# Altium PCB PCB_SHERPA_MK_II.PcbDoc
Units mm, origin at the board's own origin, x right, y up, seen from the top; angles counter-clockwise.
Board outline 70.1 x 51.31 mm, 4 copper layers (Top Layer, Mid-Layer 1, Mid-Layer 2, Bottom Layer), stack 1.584 mm thick; 105 components, 108 nets, 447 pads, 149 vias.
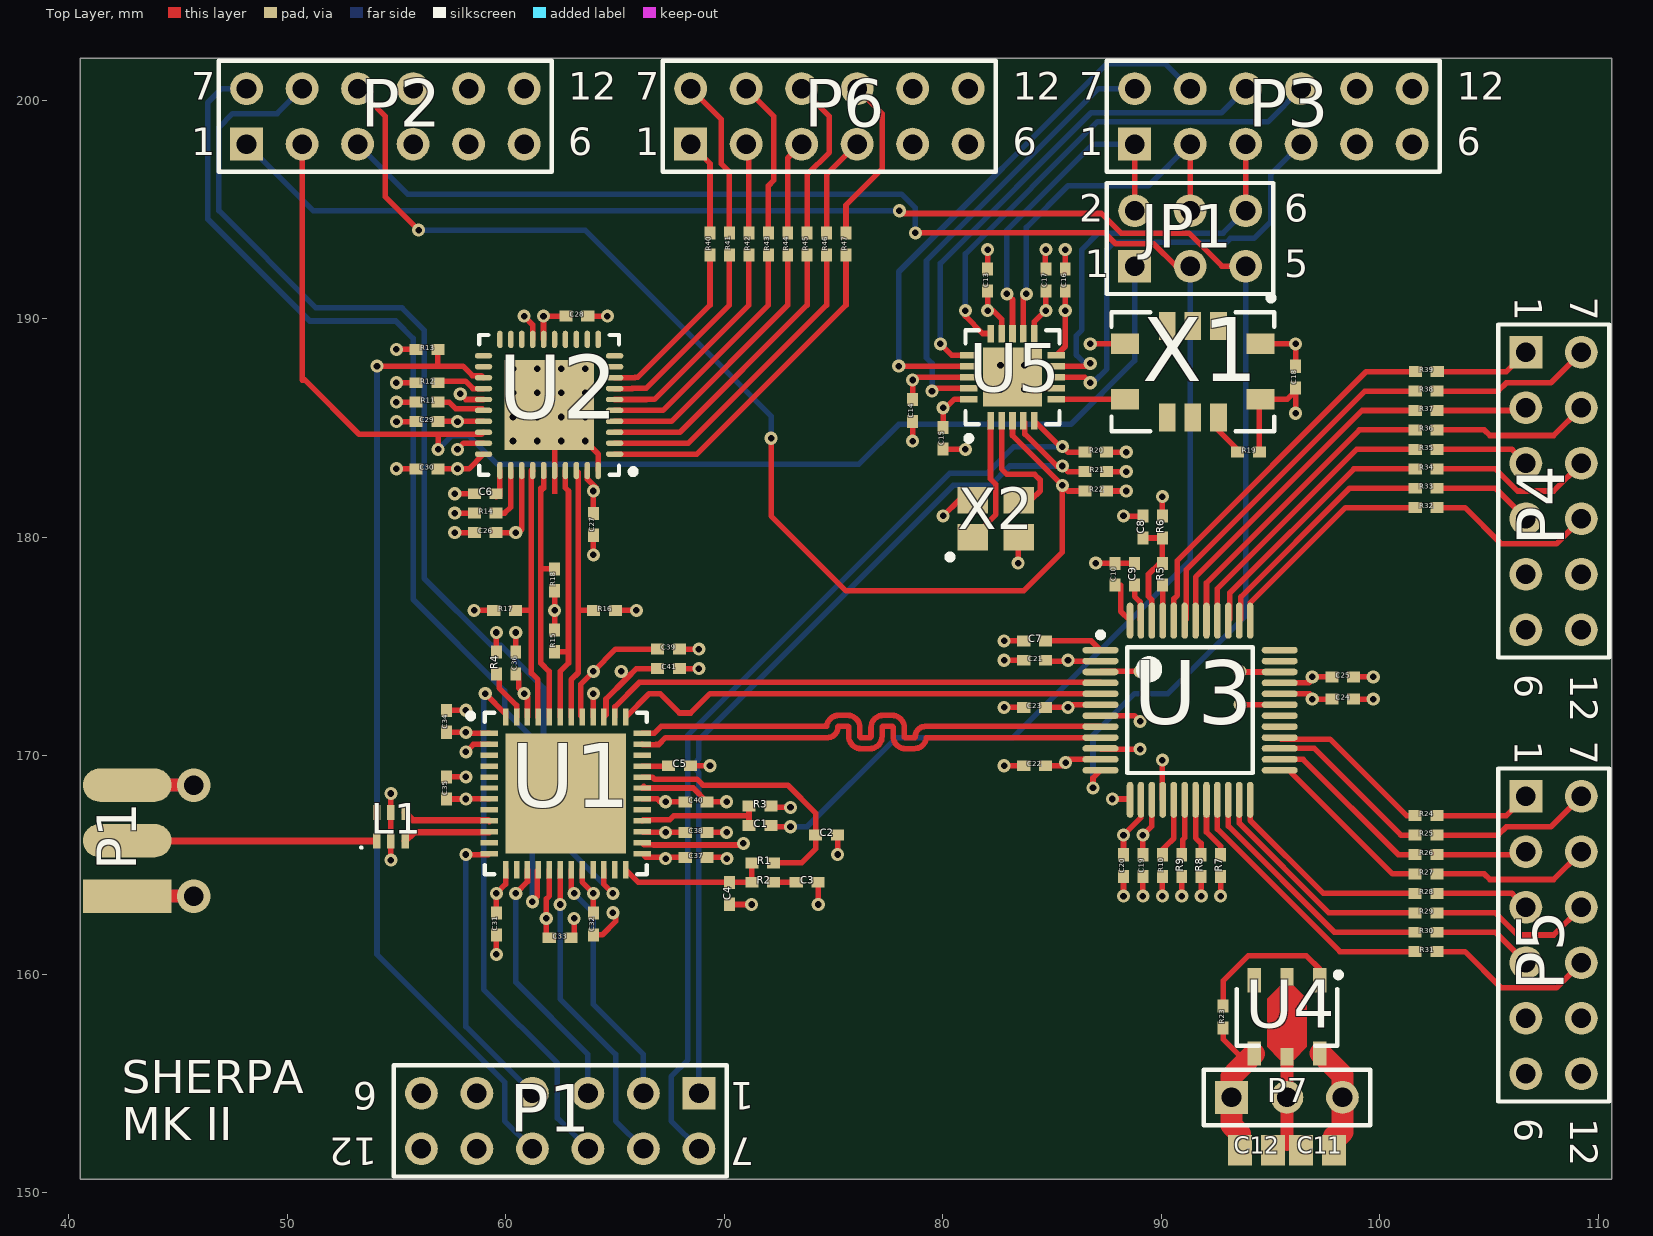
[diagram p0: Top Layer view]
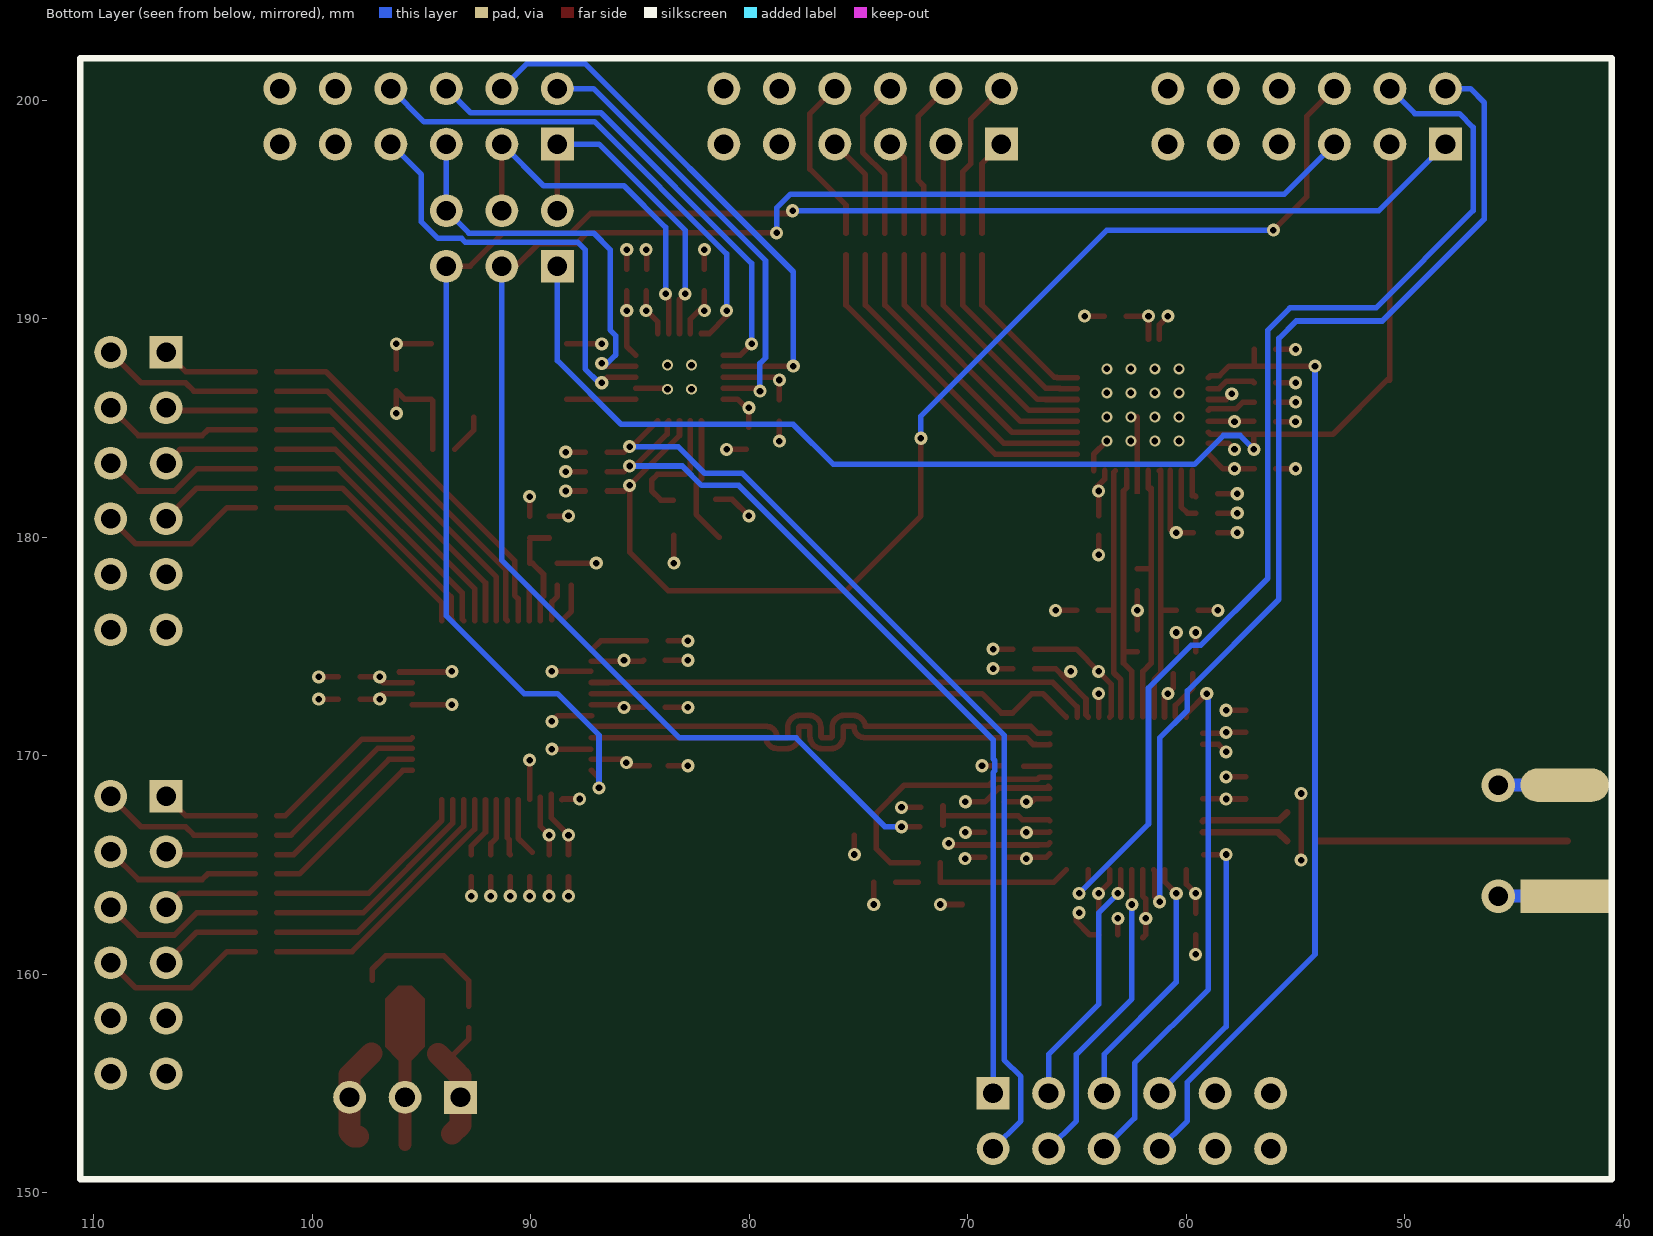
[diagram p1: Bottom Layer view, seen from below]
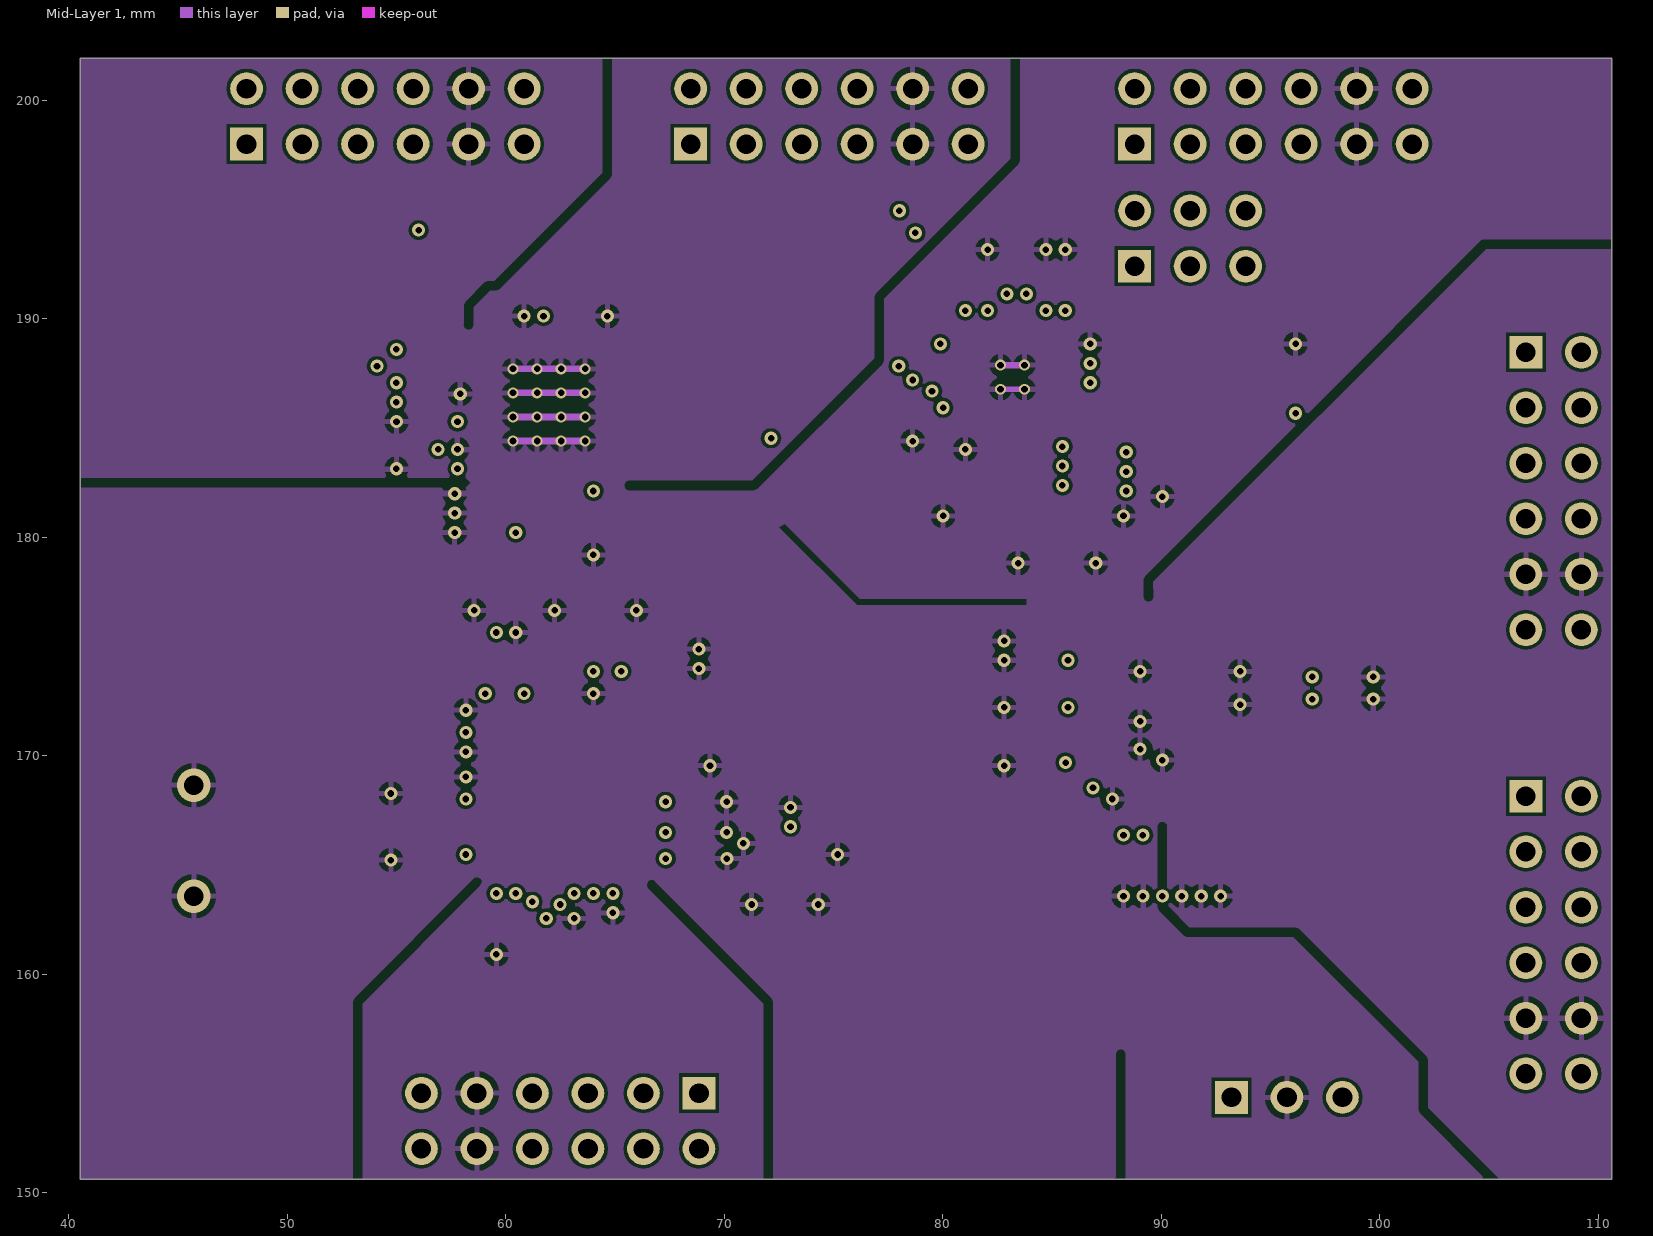
[diagram p2: Mid-Layer 1]
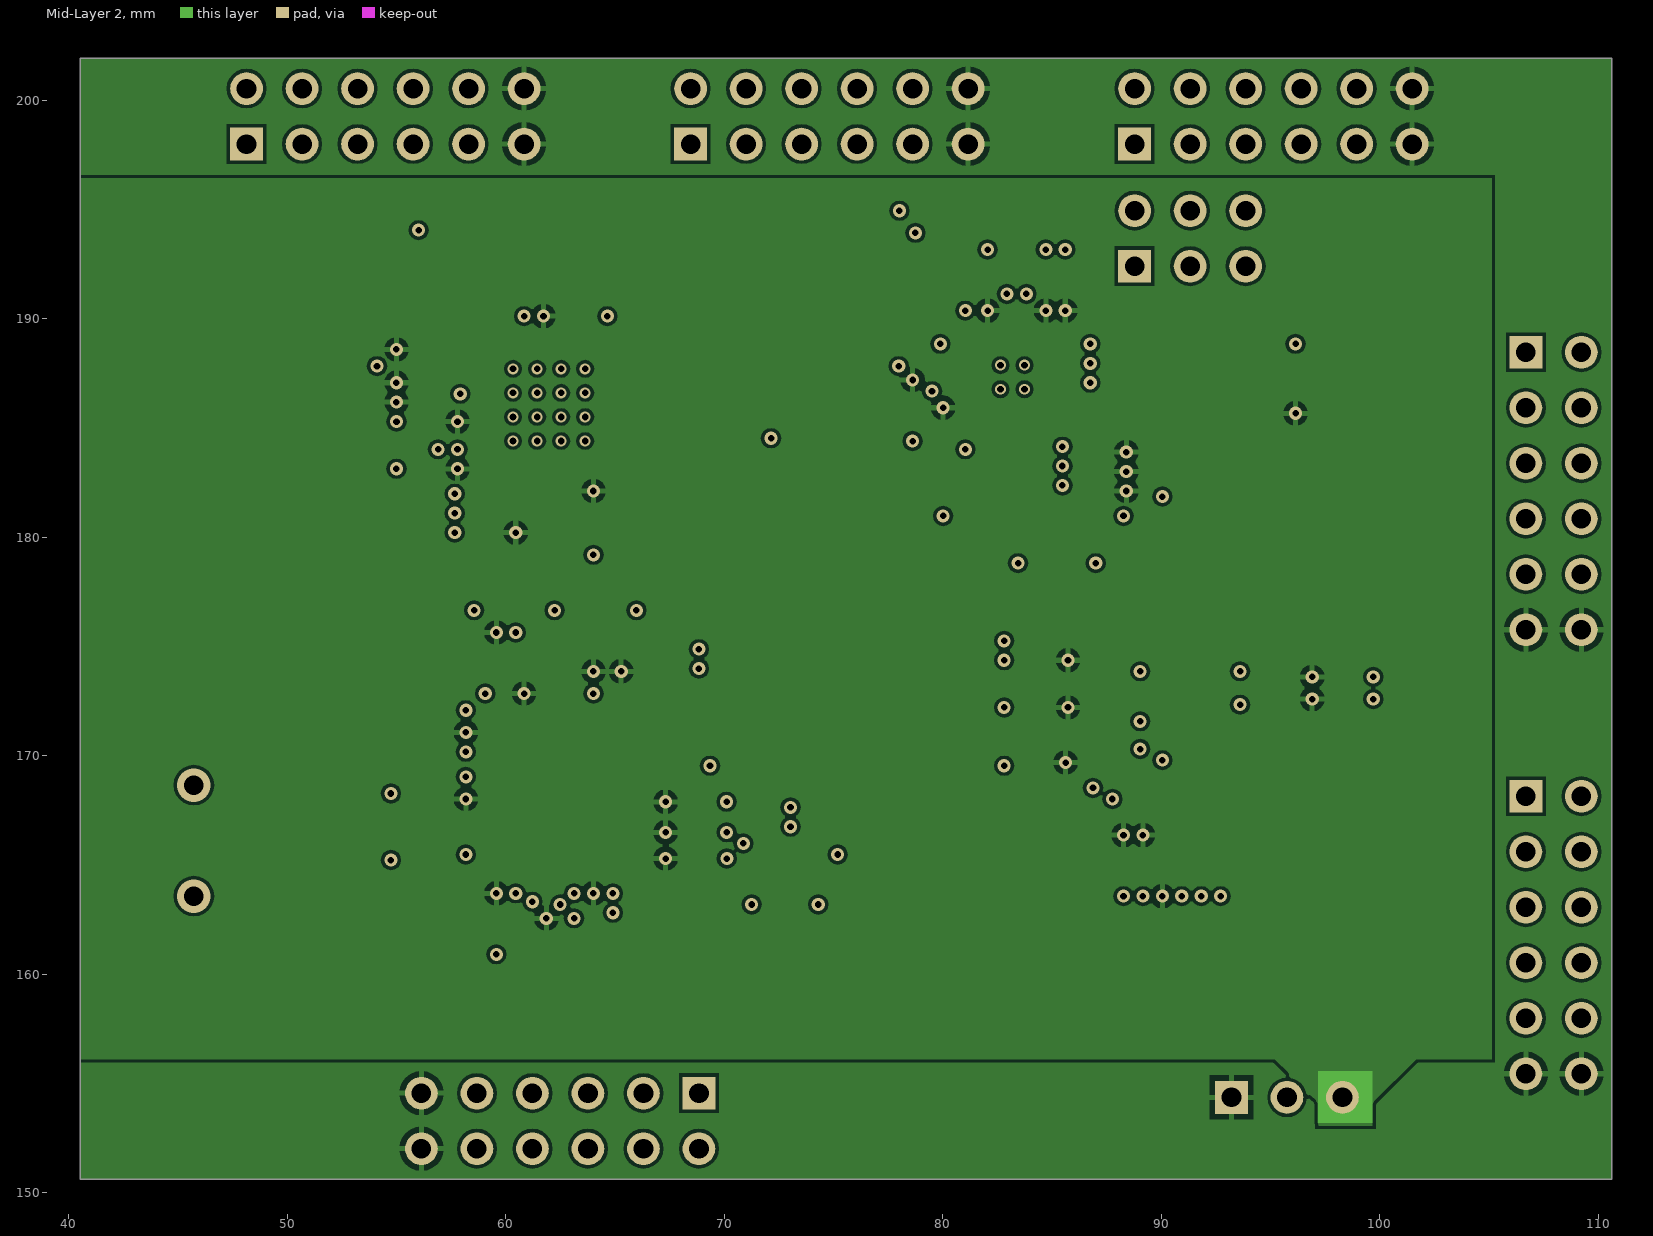
[diagram p3: Mid-Layer 2]

## Layer stack, top to bottom
Top Layer: signal copper 0.035
Dielectric: prepreg 0.18, FR-4, Dk 4.58
Mid-Layer 1: signal copper 0.017
Dielectric: core 1.12, FR-4, Dk 4.58
Mid-Layer 2: signal copper 0.017
Dielectric: prepreg 0.18, FR-4, Dk 4.58
Bottom Layer: signal copper 0.035

## Board outline
40.513,201.93 110.617,201.93 110.617,150.622 40.513,150.622

## Design rules (kind name [scope] priority, off if disabled: settings)
Clearance [All] p1: gap=0.152
ComponentClearance [All] p1: gap=0.1 collisioncheckmode=3 verticalgap=0.1 showdistances=FALSE
DiffPairsRouting [All] p1: maxlimit=0.254 minlimit=0.254 mostfreqgap=0.254 maxuncoupledlength=12.7
HoleSize [All] p1: absolutevalues=TRUE maxlimit=2.54 minlimit=0.3 maxpercent=80.000 minpercent=20.000
MinimumSolderMaskSliver [All] p1: minsoldermaskwidth=0
PolygonConnect [All] p1: connectstyle=Relief reliefconductorwidth=0.254 reliefentries=4 polygonreliefangle="90 Angle" airgapwidth=0.254
RoomDefinition Schematic_SHERPA [InComponentClass('Schematic_SHERPA')] p1: confinementstyle=ConfineIn formatcopy=TRUE lockcomponents=FALSE outline 40.513,150.622 110.617,150.622 110.617,201.93 40.513,201.93
RoutingVias [All] p1: holewidth=0.3 width=0.6 viastyle="Through Hole" minholewidth=0.3 minwidth=0.5 maxholewidth=0.3 maxwidth=0.6
SilkToSilkClearance [All] p1: silktosilkclearance=0.127
SilkToSolderMaskClearance [All] p1: minsilkscreentomaskgap=0 clearancetoexposedcopper=TRUE
SolderMaskExpansion [All] p1: expansion=0.102
Width [All] p1: maxlimit=1.016 minlimit=0.089 preferedwidth=0.254 checkconnectedcopper=TRUE
22 further rules are at their usual default settings.

## Classes and differential pairs
differential pair DAC_OUT_B: +DAC_OUT_B_P -DAC_OUT_B_N
differential pair DAC_OUT_A: +DAC_OUT_A_P -DAC_OUT_A_N
differential pair CLK: +CLK_P -CLK_N
differential pair ANT2: +ANT2_P -ANT2_N
differential pair ADC_IN_B: +ADC_IN_B_P -ADC_IN_B_N
differential pair ADC_IN_A: +ADC_IN_A_P -ADC_IN_A_N

## Components (designator, comment, footprint, x,y, rotation, side; value= is the part's Value field where it differs from the comment)
C1 "Cap Semi" 0402 71.625,166.814 r180 top
C2 "Cap Semi" 0402 74.676,166.37 r180 top
C3 "Cap Semi" 0402 73.787,164.211 r180 top
C4 "Cap Semi" 0402 70.231,163.703 r90 top
C5 "Cap Semi" 0402 67.945,169.545 r180 top
C6 "Cap Semi" 0402 59.055,181.991 r0 top
C7 "Cap Semi" 0402 84.201,175.26 r0 top
C8 "Cap Semi" 0402 89.154,180.467 r270 top
C9 "Cap Semi" 0402 88.773,178.308 r270 top
C10 "Cap Semi" 0402 87.884,178.308 r270 top
C11 "Cap Pol3" C0805 97.144,151.954 r180 top
C12 "Cap Pol3" C0805 94.35,151.954 r0 top
C13 "Cap Semi" 0402 82.042,191.77 r90 top
C14 "Cap Semi" 0402 78.613,185.801 r270 top
C15 "Cap Semi" 0402 80.01,184.531 r270 top
C16 "Cap Semi" 0402 85.598,191.77 r90 top
C17 "Cap Semi" 0402 84.709,191.77 r90 top
C18 "Cap Semi" 0402 96.139,187.325 r270 top
C19 "Cap Semi" 0402 89.154,164.973 r270 top
C20 "Cap Semi" 0402 88.265,164.973 r270 top
C21 "Cap Semi" 0402 84.201,174.371 r180 top
C22 "Cap Semi" 0402 84.201,169.545 r180 top
C23 "Cap Semi" 0402 84.201,172.212 r180 top
C24 "Cap Semi" 0402 98.298,172.593 r0 top
C25 "Cap Semi" 0402 98.298,173.609 r0 top
C26 "Cap Semi" 0402 59.055,180.213 r180 top
C27 "Cap Semi" 0402 64.008,180.594 r270 top
C28 "Cap Semi" 0402 63.246,190.119 r0 top
C29 "Cap Semi" 0402 56.388,185.293 r180 top
C30 "Cap Semi" 0402 56.388,183.134 r180 top
C31 "Cap Semi" 0402 59.563,162.306 r270 top
C32 "Cap Semi" 0402 64.008,162.306 r270 top
C33 "Cap Semi" 0402 62.484,161.671 r0 top
C34 "Cap Semi" 0402 57.277,171.577 r90 top
C35 "Cap Semi" 0402 57.277,168.529 r90 top
C36 "Cap Semi" 0402 60.452,174.244 r90 top
C37 "Cap Semi" 0402 68.707,165.354 r0 top
C38 "Cap Semi" 0402 68.707,166.497 r0 top
C39 "Cap Semi" 0402 67.437,174.879 r0 top
C40 "Cap Semi" 0402 68.707,167.894 r0 top
C41 "Cap Semi" 0402 67.437,173.99 r0 top
JP1 "Header 3X2" HDR2X3 88.773,192.405 r0 top (schematic designator JMPR)
L1 "BALUN_2" BALUN2 54.737,166.751 r90 top
P1 "Control" HDR2X6_CEN 68.834,154.559 r180 top
P1 "SMA" "SMA Connector" 42.672,163.576 r90 top
P2 "Misc" HDR2X6_CEN 48.133,197.993 r0 top
P3 "Clock" HDR2X6_CEN 88.773,197.993 r0 top
P4 "ADCA" HDR2X6_CEN 106.68,188.468 r270 top
P5 "DAC" HDR2X6_CEN 106.68,168.148 r270 top
P6 "DAC" HDR2X6_CEN 68.453,197.993 r0 top
P7 "Header 3" HDR1X3 93.207,154.367 r0 top
R1 "Res3" 0402 71.755,165.1 r0 top
R2 "Res3" 0402 71.755,164.211 r180 top
R3 "Res3" 0402 71.625,167.703 r0 top
R4 "Res3" 0402 59.563,174.244 r270 top
R5 "Res3" 0402 90.043,178.308 r90 top
R6 "Res3" 0402 90.043,180.467 r90 top
R7 "Res3" 0402 92.71,164.973 r270 top
R8 "Res3" 0402 91.821,164.973 r270 top
R9 "Res3" 0402 90.932,164.973 r270 top
R10 "Res3" 0402 90.043,164.973 r270 top
R11 "Res3" 0402 56.388,186.182 r180 top
R12 "Res3" 0402 56.388,187.071 r180 top
R13 "Res3" 0402 56.388,188.595 r180 top
R14 "Res3" 0402 59.055,181.102 r180 top
R15 "Res3" 0402 62.23,175.26 r90 top
R16 "Res3" 0402 64.516,176.657 r0 top
R17 "Res3" 0402 59.944,176.657 r180 top
R18 "Res3" 0402 62.23,178.054 r270 top
R19 "Res3" 0402 93.98,183.896 r0 top
R20 "Res3" 0402 86.995,183.896 r180 top
R21 "Res3" 0402 86.995,183.007 r180 top
R22 "Res3" 0402 86.995,182.118 r180 top
R23 "Res3" 0402 92.826,158.05 r270 top
R24 "Res3" 0402 102.108,167.259 r180 top
R25 "Res3" 0402 102.108,166.37 r180 top
R26 "Res3" 0402 102.108,165.481 r180 top
R27 "Res3" 0402 102.108,164.592 r180 top
R28 "Res3" 0402 102.108,163.703 r180 top
R29 "Res3" 0402 102.108,162.814 r180 top
R30 "Res3" 0402 102.108,161.925 r180 top
R31 "Res3" 0402 102.108,161.036 r180 top
R32 "Res3" 0402 102.116,181.356 r180 top
R33 "Res3" 0402 102.116,182.245 r180 top
R34 "Res3" 0402 102.116,183.134 r180 top
R35 "Res3" 0402 102.116,184.023 r180 top
R36 "Res3" 0402 102.116,184.912 r180 top
R37 "Res3" 0402 102.116,185.801 r180 top
R38 "Res3" 0402 102.116,186.69 r180 top
R39 "Res3" 0402 102.124,187.579 r180 top
R40 "Res3" 0402 69.342,193.421 r270 top
R41 "Res3" 0402 70.231,193.421 r270 top
R42 "Res3" 0402 71.12,193.421 r270 top
R43 "Res3" 0402 72.009,193.421 r270 top
R44 "Res3" 0402 72.898,193.421 r270 top
R45 "Res3" 0402 73.787,193.421 r270 top
R46 "Res3" 0402 74.676,193.421 r270 top
R47 "Res3" 0402 75.565,193.421 r270 top
U1 "MAX2830" MAX2830 62.738,168.275 r0 top
U2 "MAX5851" MAX5851 61.976,186.055 r180 top
U3 "MAX1195" MAX1195 91.313,172.085 r0 top
U4 "XD6220" "XC 6220" 95.747,158.177 r270 top
U5 "Si5351C" Si5351C 83.185,187.325 r90 top
X1 "7N-25.000MBP-T" 7N-25.000MBP-T 91.44,187.579 r270 top
X2 "XTAL" XTAL 82.423,180.848 r90 top

## Footprints (in the part's own frame and the unit in brackets; to place one, negate y for a bottom-side part, rotate by r counter-clockwise, add the part's x,y. Pads: shape width x height; smd on the part's side, far side on the other; paste and mask are expansions set on the pad)
7N-25.000MBP-T [mm]
  rect 1.28x0.76 smd: 1(-2.09,1.17) 2(-2.09,0) 3(-2.09,-1.17) 6(2.09,-1.17) 7(2.09,0) 8(2.09,1.17)
  rect 0.94x1.28 smd: 4(-1.27,-3.1) 5(1.27,-3.1) 9(1.27,3.1) 10(-1.27,3.1)
  silkscreen extent -3.5,-3.73 2.72,3.73, body extent -2.58,-3.57 2.57,3.57, height 2
0402 [mm] "Chip Capacitor, Body 1.0x0.5mm, IPC High Density"
  rect 0.6x0.5 smd: 1(-0.5,0) 2(0.5,0)
  body extent -0.55,-0.3 0.55,0.3, height 1.3
BALUN2 [mm]
  rect 0.7x0.35 smd: 1(-0.65,0.65) 2(-0.65,0) 3(-0.65,-0.65) 4(0.65,-0.65) 5(0.65,0) 6(0.65,0.65)
  silkscreen extent -1,1.3 -0.9,1.4, body extent -0.65,-1.05 0.65,1.05, height 0.8
C0805 [mm] "Chip Capacitor, Body 2.0x1.3mm, IPC High Density"
  rect 1.1x1.4 smd: 1(-0.75,0) 2(0.75,0)
  body extent -1.1,-0.73 1.1,0.73, height 1.4
HDR1X3 [mm] "Connector; Header; 3 Position"
  rect 1.5x1.5 hole 0.9: 1(0,0)
  round 1.5 hole 0.9: 2(2.54,0) 3(5.08,0)
  silkscreen extent -1.27,-1.27 6.35,1.27
HDR2X3 [mm] "Connector; Header; 3x2 Position"
  rect 1.5x1.5 hole 0.9: 1(0,0)
  round 1.5 hole 0.9: 2(0,2.54) 3(2.54,0) 4(2.54,2.54) 5(5.08,0) 6(5.08,2.54)
  silkscreen extent -1.27,-1.27 6.35,3.81
HDR2X6_CEN [mm] "Connector; Header; 6x2 Position"
  rect 1.5x1.5 hole 0.9: 1(0,0)
  round 1.5 hole 0.9: 2(2.54,0) 3(5.08,0) 4(7.62,0) 5(10.16,0) 6(12.7,0) 7(0,2.54) 8(2.54,2.54) 9(5.08,2.54) 10(7.62,2.54) 11(10.16,2.54) 12(12.7,2.54)
  silkscreen extent -1.27,-1.27 13.97,3.81
MAX1195 [mm] "TSQFP, 48-Leads, Body 7.00x7.00mm, Pitch 0.50mm, IPC Medium Density"
  oval 1.65x0.3 smd: 1(-4.1,2.75) 2(-4.1,2.25) 3(-4.1,1.75) 4(-4.1,1.25) 5(-4.1,0.75) 6(-4.1,0.25) 7(-4.1,-0.25) 8(-4.1,-0.75) 9(-4.1,-1.25) 10(-4.1,-1.75) 11(-4.1,-2.25) 12(-4.1,-2.75) 25(4.1,-2.75) 26(4.1,-2.25) 27(4.1,-1.75) 28(4.1,-1.25) 29(4.1,-0.75) 30(4.1,-0.25) 31(4.1,0.25) 32(4.1,0.75) 33(4.1,1.25) 34(4.1,1.75) 35(4.1,2.25) 36(4.1,2.75)
  oval 0.3x1.65 smd: 13(-2.75,-4.1) 14(-2.25,-4.1) 15(-1.75,-4.1) 16(-1.25,-4.1) 17(-0.75,-4.1) 18(-0.25,-4.1) 19(0.25,-4.1) 20(0.75,-4.1) 21(1.25,-4.1) 22(1.75,-4.1) 23(2.25,-4.1) 24(2.75,-4.1) 37(2.75,4.1) 38(2.25,4.1) 39(1.75,4.1) 40(1.25,4.1) 41(0.75,4.1) 42(0.25,4.1) 43(-0.25,4.1) 44(-0.75,4.1) 45(-1.25,4.1) 46(-1.75,4.1) 47(-2.25,4.1) 48(-2.75,4.1)
  silkscreen extent -4.22,-2.88 2.88,3.57, body extent -3.5,-3.5 3.5,3.5, height 1.2
MAX2830 [mm]
  rect 0.8x0.25 smd: 1(-3.5,2.75) 2(-3.5,2.25) 3(-3.5,1.75) 4(-3.5,1.25) 5(-3.5,0.75) 6(-3.5,0.25) 7(-3.5,-0.25) 8(-3.5,-0.75) 9(-3.5,-1.25) 10(-3.5,-1.75) 11(-3.5,-2.25) 12(-3.5,-2.75) 25(3.5,-2.75) 26(3.5,-2.25) 27(3.5,-1.75) 28(3.5,-1.25) 29(3.5,-0.75) 30(3.5,-0.25) 31(3.5,0.25) 32(3.5,0.75) 33(3.5,1.25) 34(3.5,1.75) 35(3.5,2.25) 36(3.5,2.75)
  rect 0.25x0.8 smd: 13(-2.75,-3.5) 14(-2.25,-3.5) 15(-1.75,-3.5) 16(-1.25,-3.5) 17(-0.75,-3.5) 18(-0.25,-3.5) 19(0.25,-3.5) 20(0.75,-3.5) 21(1.25,-3.5) 22(1.75,-3.5) 23(2.25,-3.5) 24(2.75,-3.5) 37(2.75,3.5) 38(2.25,3.5) 39(1.75,3.5) 40(1.25,3.5) 41(0.75,3.5) 42(0.25,3.5) 43(-0.25,3.5) 44(-0.75,3.5) 45(-1.25,3.5) 46(-1.75,3.5) 47(-2.25,3.5) 48(-2.75,3.5)
  rect 5.5x5.5 smd: 49(0,0)
  silkscreen extent -4.47,-3.7 3.7,3.7, body extent -3.55,-3.55 3.55,3.55, height 0.8
MAX5851 [mm]
  oval 0.8x0.25 smd: 1(-3,2.25) 2(-3,1.75) 3(-3,1.25) 4(-3,0.75) 5(-3,0.25) 6(-3,-0.25) 7(-3,-0.75) 8(-3,-1.25) 9(-3,-1.75) 10(-3,-2.25) 21(3,-2.25) 22(3,-1.75) 23(3,-1.25) 24(3,-0.75) 25(3,-0.25) 26(3,0.25) 27(3,0.75) 28(3,1.25) 29(3,1.75) 30(3,2.25)
  oval 0.25x0.8 smd: 11(-2.25,-3) 12(-1.75,-3) 13(-1.25,-3) 14(-0.75,-3) 15(-0.25,-3) 16(0.25,-3) 17(0.75,-3) 18(1.25,-3) 19(1.75,-3) 20(2.25,-3) 31(2.25,3) 32(1.75,3) 33(1.25,3) 34(0.75,3) 35(0.25,3) 36(-0.25,3) 37(-0.75,3) 38(-1.25,3) 39(-1.75,3) 40(-2.25,3)
  rect 4.1x4.1 smd: 41(0,0)
  silkscreen extent -3.98,-3.2 3.2,3.2, body extent -3.05,-3.05 3.05,3.05, height 0.8
Si5351C [mm]
  rect 0.8x0.3 smd: 1(-2,1) 2(-2,0.5) 3(-2,0) 4(-2,-0.5) 5(-2,-1) 11(2,-1) 12(2,-0.5) 13(2,0) 14(2,0.5) 15(2,1)
  rect 0.3x0.8 smd: 6(-1,-2) 7(-0.5,-2) 8(0,-2) 9(0.5,-2) 10(1,-2) 16(1,2) 17(0.5,2) 18(0,2) 19(-0.5,2) 20(-1,2)
  rect 2.7x2.7 smd: 21(0,0)
  silkscreen extent -2.92,-2.15 2.15,2.15, body extent -2,-2 2,2, height 0.9
"SMA Connector" [mm]
  rect 1.52x4.06 smd: GND(0,0)
  rect 1.52x4.06 smd far side: GND(0,0)
  oval 1.52x4.06 smd: GND(5.08,0) SIGNAL(2.54,0)
  oval 1.52x4.06 smd far side: GND(5.08,0)
"XC 6220" [mm] "SOT89, 3-Leads, Body 4.50x2.50mm, Pitch 1.50mm, Lead Span 3.3mm, IPC Medium Density"
  rect 1.1x0.6 smd: 1(-1.55,1.5) 3(-1.55,-1.5) 4(1.804,-1.5) 5(1.804,1.5)
  rect 0.8x0.6 smd: 2(-1.7,0) 2(1.954,0)
  Top Layer region: -1.3,0.3 -0.7,0.9 1.5,0.9 2.1,0.3 2.1,-0.3 1.5,-0.9 -0.7,-0.9 -1.3,-0.3
  silkscreen extent -1.92,-2.3 1.45,2.48, body extent -1.15,-2.3 1.45,2.3, height 1.6
XTAL [mm]
  rect 1.2x1.4 smd: GND(-0.85,-1.05) GND(0.85,1.05) XA(-0.85,1.05) XB(0.85,-1.05)
  silkscreen extent -1.87,1.98 -1.63,2.22, body extent -1.3,-1.65 1.3,1.65, height 0.8

## Part data
C1 C2 C3 C4 C5 C6 C7 C8 C9 C10 C13 C14 C15 C16 C17 C18 C19 C20 C21 C22 C23 C24 C25 C26 C27 C28 C29 C30 C31 C32 C33 C34 C35 C36 C37 C38 C39 C40 C41: "Capacitor (Semiconductor SIM Model)"
C11 C12: "Polarized Capacitor (Surface Mount)"
JP1: "Header, 3-Pin, Dual row"
P1 P2 P3 P4 P5 P6: library part "Header 6X2A", "Header, 6-Pin, Dual row"
P1: library part BNC, "BNC Elbow Connector"
P7: "Header, 3-Pin"
R1 R2 R3 R4 R5 R6 R7 R8 R9 R10 R11 R12 R13 R14 R15 R16 R17 R18 R19 R20 R21 R22 R23 R24 R25 R26 R27 R28 R29 R30 R31 R32 R33 R34 R35 R36 R37 R38 R39 R40 R41 R42 R43 R44 R45 R46 R47: "Resistor"

## Via types
v1: diameter 0.6, hole 0.3, Top Layer to Bottom Layer, 127 vias
v2: diameter 0.5, hole 0.3, Top Layer to Bottom Layer, 20 vias
v3: diameter 1.524, hole 0.9, Top Layer to Bottom Layer, 2 vias

## Nets (pads, with @x,y where several pads share a name; then routed paths per layer and width w, separated by ;. In a path a pad name is that pad's centre, name@x,y a point inside that pad or via, vN(x,y) a via of type N, cw(c..) or ccw(c..) an arc to the next point about the centre after c; other vN are vias at no path point)
ADC_CLK: JP1.5 P2.1 U3.12 | length 76.6
  Top Layer w0.254: v1(78.008,194.945) 78.135,194.818 87.249,194.818 88.151,193.916 91.258,193.916 92.769,192.405 JP1.5 ; v1(86.868,168.529) 86.868,168.99 U3.12
  Bottom Layer w0.254: P2.1 51.181,194.945 v1(78.008,194.945) ; v1(86.868,168.529) 86.868,170.942 88.773,172.847 90.297,172.847 93.853,176.403 JP1.5
ADC_IN_A_N: U1.37 U3.5 | length 23.9
  Top Layer w0.254: U1.37 66.56,172.847 67.056,172.847 67.945,171.958 68.453,171.958 69.342,172.847 86.221,172.847 ; U3.5 86.233,172.835 86.221,172.847 ; U3.5@87.213,172.847 86.221,172.847
ADC_IN_A_P: U1.38 U3.4 | length 23.9
  Top Layer w0.254: U1.38 64.988,172.24 66.103,173.355 U3.4@87.213,173.355 ; U3.4@86.431,173.355 86.443,173.343 U3.4@87.213,173.343
ADC_IN_B_N: U1.36 U3.8 | length 23.9
  Top Layer w0.254: U1.36 66.784,171.025 67.102,171.343 74.678,171.343 cw(c75.235,171.292) 75.235,171.851 75.641,171.851 cw(c75.641,171.292) 76.2,171.292 76.2,170.886 ccw(c76.251,170.886) 76.251,170.835 76.657,170.835 ccw(c76.657,170.886) 76.708,170.886 76.708,171.292 cw(c77.267,171.292) 77.267,171.851 77.673,171.851 cw(c77.673,171.292) 78.232,171.292 78.232,170.886 ccw(c78.283,170.886) 78.283,170.835 78.689,170.835 ccw(c78.689,170.886) 78.74,170.886 cw(c79.197,170.886) 79.197,171.343 U3.8@87.213,171.343
ADC_IN_B_P: U1.35 U3.9 | length 23.9
  Top Layer w0.254: U1.35 66.251,170.512 66.866,170.512 66.871,170.517 66.994,170.517 67.312,170.835 74.727,170.835 ccw(c74.727,171.292) 75.184,171.292 cw(c75.235,171.292) 75.235,171.343 75.641,171.343 cw(c75.641,171.292) 75.692,171.292 75.692,170.886 ccw(c76.251,170.886) 76.251,170.327 76.657,170.327 ccw(c76.657,170.886) 77.216,170.886 77.216,171.292 cw(c77.267,171.292) 77.267,171.343 77.673,171.343 cw(c77.673,171.292) 77.724,171.292 77.724,170.886 ccw(c78.283,170.886) 78.283,170.327 78.689,170.327 ccw(c78.689,170.886) 79.246,170.835 U3.9
AGND: C2.1 C3.1 C4.1 C5.1 C6.1 C7.1 C8.1 C9.1 C10.1 C11.2 C12.2 C13.2 C14.2 C15.2 C16.2 C17.2 C18.1 C19.2 C20.2 C21.2 C22.2 C23.2 C24.2 C25.2 C26.2 C27.2 C28.2 C29.2 C30.2 C31.2 C32.2 C33.2 C34.2 C35.2 C36.2 C37.2 C38.2 C39.2 C40.2 C41.2 L1.2 L1.5 P1.5 P1.11 P1.GND P2.5 P2.11 P3.5 P3.11 P4.5 P4.11 P5.5 P5.11 P6.5 P6.11 P7.2 R3.2 R6.2 R7.2 R8.2 R9.2 R14.2 R15.2 R16.2 R17.2 R18.2 U1.2 U1.26 U1.31 U1.40 U2.17 U2.25 U2.29 U2.36 U2.40 U2.41 U3.3 U3.7 U3.10 U3.13 U3.16 U3.31 U3.34 U4.2 U5.7 U5.21 X1.4 X1.10 X2.GND | length 117.7
  Top Layer w0.254: v1(54.737,165.227) L1.2 L1.5 v1(54.737,168.275) ; v1(54.991,183.134) C30.2 ; v1(54.995,185.293) C29.2 ; C35.2@57.269,169.037 v1(58.166,169.037) ; C34.2 v1@58.174,172.077 ; v1(57.658,180.213) C26.2 ; v1(57.658,181.102) R14.2 ; v1(57.658,181.991) C6.1 ; v1(57.785,184.023) 58.067,184.305 U2.29 ; v1(57.912,186.563) 58.17,186.305 U2.25 ; v1(58.166,170.18) 58.511,170.525 U1.2 ; v1(58.547,176.657) R17.2 ; v1(59.563,160.913) C31.2 ; C36.2 v1(60.452,175.641) ; v1(60.833,190.119) 61.226,189.726 U2.17 ; U2.36 U2.41@62.226,185.505 ; R15.2 R18.2 ; C33.2@63.119,161.806 v1(63.119,162.56) ; v2(63.626,184.405) 64.226,183.805 U2.40 ; C28.2 v1(64.643,190.119) ; 63.988,172.248 U1.40 64.008,171.795 v1(64.008,172.847) ; C32.2 64.411,161.806 65.024,162.419 v1@65.024,162.687 ; v1(64.008,179.197) C27.2@64.008,180.086 ; R16.2 v1(65.973,176.657) ; U1.26@66.295,165.968 U1.26 66.334,165.929 66.754,165.929 66.766,165.918 70.795,165.918 v1(70.866,165.989) ; U1.31@66.313,168.6 U1.31 68.576,168.525 C40.2 v1(70.1,167.894) ; C41.2 v1(68.834,173.99) ; C39.2 v1(68.834,174.879) ; C5.1 v1(69.342,169.545) ; C37.2 v1@70.104,165.354 ; C38.2 v1(70.104,166.497) ; C4.1@70.239,163.195 v1(71.247,163.195) ; R3.2@72.136,167.64 v1(73.025,167.64) ; v1@74.287,163.203 C3.1 ; v1(75.184,165.481) C2.1@75.184,166.362 ; v1(78.613,184.404) C14.2 ; v1(80.01,180.975) 80.772,181.737 X2.GND@81.534,181.737 ; C15.2@80.137,184.031 v1@81.018,184.031 ; C13.2 v1(82.042,193.167) ; v1(82.804,169.545) C22.2 ; v1(82.804,172.212) C23.2@83.828,172.212 ; v1(82.804,174.371) C21.2@83.828,174.371 ; v1(82.804,175.26) C7.1 ; v1(83.439,178.816) X2.GND@83.439,180.086 ; U5.21@83.735,186.825 U5.7 ; C17.2@84.693,192.262 v1@84.693,193.167 ; C16.2 v1(85.598,193.167) ; v1@86.868,188.849 X1.4 ; v1@87.003,178.808 C10.1 C9.1 ; U3.7 88.769,171.835 v1(89.027,171.577) ; U3.10@87.241,170.307 v1(89.027,170.307) ; U3.3@87.241,173.863 v1(89.027,173.863) ; v1(87.757,168.021) 88.527,168.021 U3.13 ; v1(88.265,163.576) C20.2 ; v1@88.273,180.967 C8.1 ; v1(89.154,163.576) C19.2 ; U3.16@90.043,168.005 v1(90.043,169.799) ; R6.2 v1(90.043,181.864) ; v1(90.932,163.576) R9.2 ; v1(91.821,163.576) R8.2 ; v1(92.71,163.576) R7.2 ; v1@93.603,172.335 U3.31 ; v1@93.627,173.835 U3.34 U3.34@96.012,173.835 ; X1.10 v1(96.139,188.849) C18.1@96.139,187.698 ; C24.2 v1(99.695,172.593) ; C25.2 v1(99.695,173.609)
  Top Layer w0.6: P1.GND@42.672,163.576 v3(45.72,163.576) ; P1.GND@42.672,168.656 v3(45.72,168.656) ; 95.747,152.208 U4.2@95.747,156.223
  Mid-Layer 1 w0.254: v2(82.635,186.775) v2(83.735,186.775)
  Mid-Layer 1 w0.3: v2(60.326,184.405) v2(61.426,184.405) v2(62.526,184.405) v2(63.626,184.405) ; v2(60.326,185.505) v2(62.526,185.505) v2(63.626,185.505) ; v2(60.326,186.605) v2(63.626,186.605) ; v2(60.326,187.705) v2(61.426,187.705) v2(62.526,187.705) v2(63.626,187.705) ; v2(82.635,187.875) v2(83.735,187.875)
  Bottom Layer w0.6: P1.GND@42.418,163.576 42.672,163.576 v3(45.72,163.576) ; P1.GND@42.672,168.656 v3(45.72,168.656)
  other v1: 64.897,162.814 74.295,163.195 70.11,165.298 58.166,172.085 93.599,172.339 93.599,173.863 62.23,176.657 86.995,178.816 88.265,180.975 81.026,184.023 86.741,188.849 84.709,193.167
  other v2: 61.426,185.505 61.426,186.605 62.526,186.605
ANT2_N: L1.3 U1.10 | length 4
  Top Layer w0.313: L1.3 55.785,166.499 59.236,166.499 U1.10@59.238,166.497
ANT2_P: L1.4 U1.9 | length 4
  Top Layer w0.313: L1.4 55.737,167.051 59.192,167.051 U1.9@59.238,167.005
CLK0: JP1.2 P3.1 U5.13 | length 15.4
  Top Layer w0.254: v1(82.931,191.135) 83.185,190.881 U5.13 ; JP1.2 P3.1
  Bottom Layer w0.254: v1(82.931,191.135) 82.931,194.056 86.868,197.993 P3.1 ; JP1.2@88.706,194.945 JP1.2
CLK1: JP1.4 P3.2 U5.12 | length 17
  Top Layer w0.254: U5.12 83.685,191 v1(83.82,191.135) ; JP1.4 P3.2
  Bottom Layer w0.254: v1(83.82,191.135) 83.82,194.183 85.725,196.088 89.408,196.088 P3.2
CLK2: JP1.6 P3.3 U5.9 | length 21.7
  Top Layer w0.254: U5.9 v1@86.733,187.825 ; JP1.6 P3.3
  Bottom Layer w0.254: v1(86.741,187.96) 86.614,187.833 86.106,188.341 86.106,189.232 86.36,189.486 86.36,193.167 87.109,193.916 92.824,193.916 JP1.6 P3.3
CLK3: P3.4 U5.8 | length 20.3
  Top Layer w0.254: U5.8 86.487,187.325 v1(86.741,187.071)
  Bottom Layer w0.254: v1(86.741,187.071) 86.868,187.071 87.503,187.706 87.503,193.167 87.845,193.509 92.992,193.509 93.158,193.675 94.234,193.675 94.996,194.437 94.996,196.596 P3.4
CLK4: P3.7 U5.19 | length 20.6
  Top Layer w0.254: v1(79.502,186.69) 79.637,186.825 U5.19
  Bottom Layer w0.254: v1(79.502,186.69) 79.502,187.96 79.248,188.214 79.248,192.659 87.122,200.533 P3.7
CLK5: P3.8 U5.17 | length 25.3
  Top Layer w0.254: v1(77.978,187.833) 80.018,187.825 U5.17
  Bottom Layer w0.254: v1(77.978,187.833) 77.978,192.151 87.503,201.676 90.17,201.676 P3.8
CLK6: P3.9 U5.16 | length 22.5
  Top Layer w0.254: v1(79.883,188.849) 80.407,188.325 U5.16
  Bottom Layer w0.254: v1(79.883,188.849) 79.883,192.532 86.78,199.429 92.749,199.429 P3.9
CLK7: P3.10 U5.15 | length 22.9
  Top Layer w0.254: v1(81.026,190.373) 81.026,190.119 81.82,189.325 U5.15
  Bottom Layer w0.254: v1(81.026,190.373) 81.026,192.97 87.078,199.022 89.639,199.022 89.652,199.009 90.873,199.009 90.887,199.022 91.739,199.022 91.753,199.009 93.413,199.009 93.427,199.022 94.279,199.022 94.293,199.009 94.869,199.009 P3.10
CLK_N: U5.2 X2.XB | length 5.8
  Top Layer w0.254: U5.2 82.685,183.126 82.931,182.88 84.201,182.88 84.455,182.626 84.455,182.118 84.035,181.698 X2.XB
CLK_P: U5.1 X2.XA | length 5.9
  Top Layer w0.254: X2.XA 82.423,181.048 82.423,182.424 82.177,182.67 82.177,185.317 U5.1
CS: P1.3 U1.15 | length 11.8
  Top Layer w0.254: v1(60.452,163.703) 60.988,164.239 U1.15
  Bottom Layer w0.254: v1(60.452,163.703) 60.452,159.639 63.754,156.337 P1.3
CW: P1.10 R13.1 U2.23 | length 44.6
  Top Layer w0.254: v1(54.102,187.833) 58.036,187.833 58.469,187.401 58.88,187.401 U2.23 ; 56.888,187.841 R13.1
  Bottom Layer w0.254: v1(54.102,187.833) 54.102,160.909 59.944,155.067 59.944,153.289 P1.10
DAC_CLK: JP1.1 P2.2 U2.28 | length 59.7
  Top Layer w0.254: 50.673,187.198 P2.2 ; 50.8,187.198 53.284,184.714 58.885,184.714 U2.28 ; v1(56.896,184.023) 56.896,184.714
  Bottom Layer w0.254: v1(56.896,184.023) 57.531,184.658 58.293,184.658 59.619,183.332 76.144,183.332 77.978,185.166 85.852,185.166 88.773,188.087 JP1.1
DAC_OUT_A_N: R15.1 U1.43 U2.37 | length 12.1
  Top Layer w0.254: R15.1 62.793,174.76 ; U1.43 62.488,172.506 62.484,172.51 62.484,173.863 62.865,174.244 62.865,182.118 62.726,182.257 U2.37
DAC_OUT_A_P: R16.1 U1.42 U2.38 | length 12.1
  Top Layer w0.254: U1.42 62.988,172.716 62.992,172.72 62.992,173.482 63.31,173.8 63.31,182.971 U2.38@63.234,183.047 ; 63.373,176.657 R16.1
DAC_OUT_B_N: R17.1 U1.45 U2.34 | length 12.1
  Top Layer w0.254: R17.1 61.087,176.657 ; U2.34@61.167,182.996 U2.34@61.218,183.047 ; U2.34@61.167,183.055 61.167,173.783 61.468,173.482 U1.45@61.468,171.775
DAC_OUT_B_P: R18.1 U1.44 U2.35 | length 12.1
  Top Layer w0.254: 61.595,182.118 61.726,182.249 U2.35 ; 61.595,182.249 61.595,174.244 61.976,173.863 U1.44@61.976,171.787 ; 61.693,178.554 R18.1
DIN: P1.2 U1.19 | length 11.6
  Top Layer w0.254: U1.19 62.988,163.834 v1(63.119,163.703)
  Bottom Layer w0.254: v1(63.119,163.703) 64.008,162.814 64.008,158.623 66.294,156.337 P1.2
INTR: P2.9 R22.2 U5.3 | length 55.4
  Top Layer w0.254: P2.9 54.483,199.263 54.483,195.58 v1(56.007,194.056) ; v1(72.136,184.531) 72.136,180.975 75.565,177.546 83.693,177.546 85.471,179.324 v1(85.471,182.372) ; U5.3 83.185,184.658 v1(85.471,182.372) ; R22.2 85.725,182.118 v1(85.471,182.372)
  Bottom Layer w0.254: v1(56.007,194.056) 63.627,194.056 72.136,185.547 v1(72.136,184.531)
LD: P2.8 U1.22 | length 50.9
  Top Layer w0.254: U1.22 64.488,164.112 v1(64.897,163.703)
  Bottom Layer w0.254: P2.8 49.53,199.39 47.498,199.39 46.863,198.755 46.863,194.945 51.308,190.5 55.245,190.5 56.261,189.484 56.261,178.124 59.323,175.062 59.761,175.062 61.722,173.101 61.722,166.878 v1(64.897,163.703)
MAX2830_CLOCK: C1.1 JP1.3 P2.3 | length 78.7
  Top Layer w0.254: C1.1@72.187,166.751 v1(73.025,166.751) ; v1(78.74,193.929) 87.413,193.929 87.907,193.434 89.639,193.434 90.668,192.405 JP1.3
  Bottom Layer w0.254: P2.3 55.499,195.707 78.105,195.707 78.74,195.072 v1(78.74,193.929) ; v1(73.025,166.751) 73.787,166.751 77.851,170.815 83.185,170.815 91.313,178.943 JP1.3
NetC1_2: C1.2 R3.1 U1.28 | length 5.9
  Top Layer w0.254: U1.28 66.289,167.076 67.508,167.076 67.691,167.259 71.12,167.259 ; C1.2 R3.1
NetC2_2: C2.2 R1.2 U1.32 | length 12.4
  Top Layer w0.254: U1.32 66.708,169.025 66.802,168.931 68.744,168.931 69.02,168.656 72.898,168.656 74.176,167.378 C2.2 74.176,165.743 73.533,165.1 R1.2
NetC3_2: C3.2 R2.1 | length 1
  Top Layer w0.254: R2.1 C3.2
NetC4_2: C4.2 R1.1 R2.2 U1.24 | length 6.9
  Top Layer w0.254: U1.24 66.06,164.203 C4.2 ; C4.2@70.239,164.211 R2.2 R1.1
NetC5_2: C5.2 U1.33 | length 1.2
  Top Layer w0.254: U1.33 C5.2@67.425,169.525
NetC6_2: C6.2 U2.31 | length 1.2
  Top Layer w0.254: C6.2@59.555,181.864 C6.2@59.599,181.908 ; C6.2@59.726,181.908 U2.31
NetC7_2: C7.2 U3.1 | length 2.7
  Top Layer w0.254: C7.2 86.788,175.26 U3.1
NetC8_2: C8.2 R5.2 R6.1 U3.46 | length 4.9
  Top Layer w0.254: C8.2 R6.1 ; U3.46 89.563,177.137 89.408,177.292 89.408,178.308 89.908,178.808 R5.2 R6.1@90.043,179.824
NetC9_2: C9.2 U3.47 | length 1.7
  Top Layer w0.254: C9.2 88.773,177.292 89.027,177.038 U3.47@89.027,176.221
NetC10_2: C10.2 U3.48 | length 1.8
  Top Layer w0.254: 88.138,177.808 88.138,176.61 U3.48
NetL1_1: L1.1 P1.SIGNAL | length 11.6
  Top Layer w0.254: P1.SIGNAL P1.SIGNAL@42.687,166.101
  Top Layer w0.306: P1.SIGNAL@42.545,166.101 L1.1
NetP4_1: P4.1 R39.1 | length 4.4
  Top Layer w0.254: R39.1@102.608,187.579 105.791,187.579 P4.1
NetP4_2: P4.2 R37.1 | length 4.1
  Top Layer w0.254: R37.1@102.608,185.801 106.553,185.801 P4.2
NetP4_3: P4.3 R35.1 | length 4.3
  Top Layer w0.254: R35.1@102.608,184.023 106.045,184.023 P4.3
NetP4_4: P4.4 R33.1 | length 4.7
  Top Layer w0.254: R33.1@102.608,182.245 105.283,182.245 P4.4
NetP4_7: P4.7 R38.1 | length 7.3
  Top Layer w0.254: R38.1@102.608,186.69 105.41,186.69 105.791,187.071 107.823,187.071 P4.7
NetP4_8: P4.8 R36.1 | length 7.2
  Top Layer w0.254: R36.1@102.608,184.912 104.775,184.912 105.029,184.658 107.95,184.658 P4.8
NetP4_9: P4.9 R34.1 | length 7.6
  Top Layer w0.254: R34.1@102.608,183.134 105.283,183.134 106.299,182.118 107.95,182.118 P4.9
NetP4_10: P4.10 R32.1 | length 7.8
  Top Layer w0.254: R32.1@102.608,181.356 103.886,181.356 105.537,179.705 108.077,179.705 P4.10
NetP5_1: P5.1 R24.1 | length 4.4
  Top Layer w0.254: R24.1 105.791,167.259 P5.1
NetP5_2: P5.2 R26.1 | length 4.1
  Top Layer w0.254: R26.1 106.553,165.481 P5.2
NetP5_3: P5.3 R28.1 | length 4.3
  Top Layer w0.254: R28.1 106.045,163.703 P5.3
NetP5_4: P5.4 R30.1 | length 4.7
  Top Layer w0.254: R30.1 105.283,161.925 P5.4
NetP5_7: P5.7 R25.1 | length 7.3
  Top Layer w0.254: R25.1 105.41,166.37 105.791,166.751 107.823,166.751 P5.7
NetP5_8: P5.8 R27.1 | length 7.2
  Top Layer w0.254: R27.1 104.775,164.592 105.029,164.338 107.95,164.338 P5.8
NetP5_9: P5.9 R29.1 | length 7.6
  Top Layer w0.254: R29.1 105.283,162.814 106.299,161.798 107.95,161.798 P5.9
NetP5_10: P5.10 R31.1 | length 7.8
  Top Layer w0.254: R31.1 103.886,161.036 105.537,159.385 108.077,159.385 P5.10
NetP6_1: P6.1 R40.1 | length 4.4
  Top Layer w0.254: P6.1 69.342,197.104 R40.1
NetP6_2: P6.2 R42.1 | length 4.1
  Top Layer w0.254: P6.2 71.12,197.866 R42.1
NetP6_3: P6.3 R44.1 | length 4.3
  Top Layer w0.254: R44.1 72.898,197.358 P6.3
NetP6_4: P6.4 R46.1 | length 4.7
  Top Layer w0.254: R46.1 74.676,196.596 P6.4
NetP6_7: P6.7 R41.1 | length 7.3
  Top Layer w0.254: P6.7 69.85,199.136 69.85,197.104 70.231,196.723 R41.1
NetP6_8: P6.8 R43.1 | length 7.2
  Top Layer w0.254: P6.8 72.263,199.263 72.263,196.342 72.009,196.088 R43.1
NetP6_9: P6.9 R45.1 | length 7.6
  Top Layer w0.254: P6.9 74.803,199.263 74.803,197.612 73.787,196.596 R45.1
NetP6_10: P6.10 R47.1 | length 7.8
  Top Layer w0.254: R47.1 75.565,195.199 77.216,196.85 77.216,199.39 P6.10
NetR4_2: R4.2 U1.47 | length 2.3
  Top Layer w0.254: R4.2@59.69,173.744 59.69,173.101 60.488,172.303 U1.47
NetR5_1: R5.1 U3.45 | length 1.7
  Top Layer w0.254: U3.45 90.063,177.701 R5.1@90.17,177.808
NetR7_1: R7.1 U3.20 | length 3
  Top Layer w0.254: U3.20 92.063,166.509 92.71,165.862 R7.1 R7.1@92.71,165.735
NetR8_1: R8.1 U3.19 | length 2.6
  Top Layer w0.254: U3.19 91.563,166.247 91.821,165.989 R8.1
NetR9_1: R9.1 U3.18 | length 2.6
  Top Layer w0.254: R9.1 90.969,165.51 90.969,166.153 91.063,166.247 U3.18
NetR10_1: R10.1 U3.17 | length 2.7
  Top Layer w0.254: R10.1@89.928,165.588 90.182,165.842 90.563,166.223 U3.17
NetR11_1: R11.1 U2.26 | length 2.2
  Top Layer w0.254: R11.1 57.404,186.182 57.714,185.872 58.909,185.872 U2.26
NetR12_1: R12.1 U2.24 | length 2.3
  Top Layer w0.254: R12.1 56.959,187.142 58.152,187.142 58.489,186.805 U2.24
NetR14_1: R14.1 U2.32 | length 2.5
  Top Layer w0.254: R14.1 59.944,181.102 60.226,181.384 U2.32
NetR19_1: R19.1 X1.8 | length 1.8
  Top Layer w0.254: X1.8 92.61,184.893 R19.1@93.48,184.023
NetR23_1: R23.1 U4.1 | length 6.8
  Top Layer w0.254: R23.1@92.837,158.55 92.837,159.712 93.969,160.844 96.636,160.844 97.247,160.233 U4.1
NetR24_2: R24.2 U3.28 | length 7.7
  Top Layer w0.254: U3.28 95.484,170.764 97.714,170.764 101.219,167.259 R24.2
NetR25_2: R25.2 U3.27 | length 7.8
  Top Layer w0.254: U3.27 97,170.335 100.965,166.37 R25.2
NetR26_2: R26.2 U3.26 | length 8
  Top Layer w0.254: U3.26 96.484,169.835 100.838,165.481 R26.2
NetR27_2: R27.2 U3.25 | length 8.2
  Top Layer w0.254: U3.25 95.841,169.335 100.584,164.592 R27.2
NetR28_2: R28.2 U3.24 | length 9.9
  Top Layer w0.254: U3.24 94.063,167.049 97.409,163.703 R28.2
NetR29_2: R29.2 U3.23 | length 10.8
  Top Layer w0.254: U3.23 93.563,166.914 97.663,162.814 R29.2
NetR30_2: R30.2 U3.22 | length 11.8
  Top Layer w0.254: U3.22 93.063,166.779 97.917,161.925 R30.2
NetR31_2: R31.2 U3.21 | length 12.7
  Top Layer w0.254: U3.21 92.563,166.644 98.171,161.036 R31.2
NetR32_2: R32.2 U3.37 | length 10.2
  Top Layer w0.254: U3.37 94.063,176.994 98.425,181.356 R32.2
NetR33_2: R33.2 U3.38 | length 11.2
  Top Layer w0.254: U3.38 93.634,176.256 93.634,177.266 98.612,182.245 R33.2
NetR34_2: R34.2 U3.39 | length 12.1
  Top Layer w0.254: U3.39 93.134,176.256 93.134,177.462 98.806,183.134 R34.2
NetR35_2: R35.2 U3.40 | length 13.2
  Top Layer w0.254: U3.40 92.563,177.653 98.933,184.023 R35.2
NetR36_2: R36.2 U3.41 | length 14.2
  Top Layer w0.254: U3.41 92.063,177.915 99.06,184.912 R36.2
NetR37_2: R37.2 U3.42 | length 15.2
  Top Layer w0.254: U3.42 91.563,178.177 99.187,185.801 R37.2
NetR38_2: R38.2 U3.43 | length 16.2
  Top Layer w0.254: U3.43 91.134,176.256 91.134,178.51 99.314,186.69 R38.2
NetR39_2: R39.2 U3.44 | length 17.3
  Top Layer w0.254: U3.44 90.563,177.177 90.727,177.341 90.727,178.932 99.374,187.579 R39.2
NetR40_2: R40.2 U2.8 | length 8
  Top Layer w0.254: U2.8 65.893,187.305 65.913,187.325 66.04,187.325 69.342,190.627 R40.2
NetR41_2: R41.2 U2.7 | length 9.1
  Top Layer w0.254: U2.7 65.774,186.805 65.786,186.817 66.421,186.817 70.231,190.627 R41.2
NetR42_2: R42.2 U2.6 | length 10.2
  Top Layer w0.254: U2.6 66.417,186.305 66.421,186.309 66.802,186.309 71.12,190.627 R42.2
NetR43_2: R43.2 U2.5 | length 11.3
  Top Layer w0.254: U2.5 67.187,185.805 72.009,190.627 R43.2
NetR44_2: R44.2 U2.4 | length 12.4
  Top Layer w0.254: U2.4 67.576,185.305 72.898,190.627 R44.2
NetR45_2: R45.2 U2.3 | length 13.5
  Top Layer w0.254: U2.3 67.965,184.805 73.787,190.627 R45.2
NetR46_2: R46.2 U2.2 | length 14.6
  Top Layer w0.254: U2.2 68.354,184.305 74.676,190.627 R46.2
NetR47_2: R47.2 U2.1 | length 15.7
  Top Layer w0.254: U2.1 68.743,183.805 75.565,190.627 R47.2
NetU5_6: U5.6 X1.5 | length 3.2
  Top Layer w0.254: U5.6 85.201,186.309 X1.5
RSSI: P2.7 U1.16 | length 48.6
  Top Layer w0.254: v1(61.214,163.322) 61.443,163.551 61.443,164.73 U1.16
  Bottom Layer w0.254: P2.7 46.99,200.533 46.355,199.898 46.355,194.564 51.022,189.897 54.959,189.897 55.753,189.103 55.753,177.165 59.944,172.974 59.944,172.085 61.214,170.815 v1(61.214,163.322)
RXTX: P1.9 U1.48 | length 24.3
  Top Layer w0.254: v1(59.055,172.847) 59.988,171.914 U1.48
  Bottom Layer w0.254: v1(59.055,172.847) 58.984,172.776 58.984,159.314 62.357,155.94 62.357,153.416 P1.9
SCL: P1.1 R21.2 U5.4 | length 42.1
  Top Layer w0.254: U5.4 83.756,185.254 83.756,184.722 85.217,183.261 v1(85.471,183.261) 85.725,183.007 R21.2
  Bottom Layer w0.254: P1.1 68.834,169.234 68.763,169.305 68.763,169.785 68.834,169.856 68.834,170.734 80.472,182.372 82.169,182.372 83.058,183.261 v1(85.471,183.261)
SCLK: P1.8 U1.18 | length 14.4
  Top Layer w0.254: v1(62.484,163.195) 62.488,163.961 U1.18
  Bottom Layer w0.254: v1@62.54,163.139 v1(62.484,163.195) 62.484,158.877 65.024,156.337 65.024,153.289 P1.8
SDA: P1.7 R20.2 U5.5 | length 45.3
  Top Layer w0.254: U5.5 85.36,184.15 v1(85.471,184.15) 85.725,183.896 R20.2
  Bottom Layer w0.254: P1.7 67.564,153.289 67.564,155.321 68.326,156.083 68.326,170.942 80.31,182.926 82.028,182.926 83.252,184.15 v1(85.471,184.15)
SHDN: P1.4 U1.12 | length 13.2
  Top Layer w0.254: v1(58.166,165.481) U1.12@59.194,165.481
  Bottom Layer w0.254: v1(58.166,165.481) 58.166,157.607 P1.4
V_IN: C12.1 P1.6 P1.12 P2.6 P2.12 P3.6 P3.12 P4.6 P4.12 P5.6 P5.12 P6.6 P6.12 P7.1 R23.2 U4.4 | length 7
  Top Layer w0.254: R23.2@92.837,157.55 92.837,157.023 93.842,156.018 93.842,155.968 93.207,155.333
  Top Layer w1: 93.207,155.333 93.207,153.097 93.6,152.704 ; 93.334,155.46 U4.4@94.238,156.364
VCC: C11.1 C13.1 C14.1 C15.1 C16.1 C17.1 C18.2 C19.1 C20.1 C21.1 C22.1 C23.1 C24.1 C25.1 C26.1 C27.1 C28.1 C29.1 C30.1 C31.1 C32.1 C33.1 C34.1 C35.1 C36.1 C37.1 C38.1 C39.1 C40.1 C41.1 P7.3 R4.1 R10.2 R11.2 R12.2 R13.2 R19.2 R20.1 R21.1 R22.1 U1.1 U1.7 U1.13 U1.17 U1.20 U1.25 U1.27 U1.30 U1.39 U1.41 U1.46 U2.16 U2.27 U2.30 U2.33 U2.39 U3.2 U3.6 U3.11 U3.14 U3.15 U3.32 U3.33 U4.5 U5.10 U5.11 U5.14 U5.18 U5.20 X1.9 | length 91.1
  Top Layer w0.254: v1(54.991,186.182) R11.2 ; v1(54.991,187.071) R12.2 ; v1(54.991,188.595) R13.2 ; C30.1 v1(57.785,183.134) 58.305,183.134 U2.30 ; C29.1@56.9,185.305 U2.27 ; C35.1@57.269,168.021 v1(58.166,168.021) ; C34.1@57.269,171.069 v1(58.166,171.069) ; v1@58.17,168.025 U1.7 ; v1@58.21,171.025 U1.1 ; C31.1 v1(59.563,163.703) 59.988,164.128 U1.13 ; R4.1@59.563,174.752 v1(59.563,175.641) ; C26.1@59.682,180.213 60.579,180.213 60.726,180.36 U2.33 ; C36.1@60.579,173.744 60.579,173.101 v1(60.833,172.847) 60.988,172.692 U1.46 ; U2.16 61.722,189.059 v1(61.722,190.119) C28.1 ; C33.1 61.849,161.806 v1(61.849,162.56) 61.849,163.449 61.988,163.588 U1.17 ; U1.20 63.488,164.223 v1(64.008,163.703) C32.1 ; U1.41 63.429,171.834 63.429,173.284 v1(64.008,173.863) 65.024,174.879 C39.1 ; U2.39 63.726,182.654 v1@64.135,182.245 ; C27.1@64.008,180.975 C27.1 v1(64.008,182.118) ; U1.39 64.582,171.869 64.582,172.598 65.532,173.549 ; v1(65.278,173.863) 65.532,173.609 65.532,173.549 ; U1.25 66.407,165.354 C37.1 ; U1.27 66.266,166.497 C38.1 ; U1.30 66.925,168.025 67.052,167.898 C40.1@68.33,167.898 ; C41.1 65.973,173.99 65.532,173.549 ; C14.1 v1(78.613,187.198) 78.74,187.325 U5.18 ; C15.1 80.01,185.801 80.534,186.325 U5.20 ; C13.1 v1(82.042,190.373) 82.296,190.373 82.685,189.984 U5.14 ; U5.11 84.185,189.865 v1@84.693,190.373 ; C22.1@84.574,169.545 85.471,169.545 85.761,169.835 U3.11 ; v1(84.709,190.373) C17.1 ; C23.1@84.828,172.212 v1(85.725,172.212) 85.848,172.335 U3.6 ; C21.1@84.828,174.371 84.864,174.335 U3.2 ; U5.10 85.598,188.738 C16.1 ; R22.1 v1(88.392,182.118) ; R21.1 v1(88.392,183.007) ; R20.1 v1(88.392,183.896) ; C20.1 v1(88.265,166.37) 89.063,167.168 U3.14@89.063,168.239 ; v1@89.055,166.469 v1(89.154,166.37) ; C19.1 v1(89.154,166.37) ; U3.15@89.563,168.112 89.563,166.779 v1(89.154,166.37) ; v1(90.043,163.576) R10.2 ; R19.2@94.48,184.023 94.48,186.249 X1.9 95.75,186.309 96.139,186.698 v1(96.139,185.674) ; U3.32 v1@96.786,172.835 ; U3.33 96.754,173.335 ; 96.627,173.335 v1(96.901,173.609) C25.1 ; 96.659,172.835 v1(96.901,172.593) C24.1 ; U4.5 U4.5@97.273,156.399
  Top Layer w1: U4.5@97.282,156.39 98.287,155.385 98.287,152.77 98.094,152.577 97.894,152.577 C11.1@97.894,152.589
  other v1: 67.313,165.298 67.31,166.497 67.31,167.894 85.616,169.69 85.725,174.371 60.452,180.213 57.785,185.293 80.01,185.928 85.598,190.373
pads on no net: L1.6 P2.4 P2.10 U1.3 U1.4 U1.5 U1.6 U1.8 U1.11 U1.14 U1.21 U1.23 U1.29 U1.34 U1.49 U2.9 U2.10 U2.11 U2.12 U2.13 U2.14 U2.15 U2.18 U2.19 U2.20 U2.21 U2.22 U3.29 U3.30 U3.35 U3.36 U4.3 X1.1 X1.2 X1.3 X1.6 X1.7

## Polygon pours and split planes (outlines as drawn)
VCC on Mid-Layer 2 "Mid-Layer 1-No Net" (solid, pour order 24): 40.513,155.956 95.123,155.956 96.99,154.089 97.028,154.051 97.028,152.908 99.822,152.908 99.822,154.051 101.727,155.956 105.283,155.956 105.283,196.596 40.513,196.596
V_IN on Mid-Layer 2 "Mid-Layer 1-No Net" (solid, pour order 22): 40.513,150.622 40.513,155.956 95.123,155.956 97.028,154.051 97.028,152.908 99.822,152.908 99.822,154.051 101.727,155.956 105.283,155.956 105.283,196.596 40.513,196.596 40.513,201.93 110.617,201.93 110.617,150.622 40.513,150.622 40.513,155.956
AGND on Mid-Layer 1 "Mid-Layer 1-No Net" (solid, remove dead copper, pour order 20): 53.442,150.622 71.78,150.622 71.78,158.655 66.513,163.922 cw(c66.675,164.084) 66.837,164.246 72.171,158.912 72.238,158.75 72.238,150.622 87.909,150.622 87.909,156.337 cw(c88.138,156.337) 88.367,156.337 88.367,150.622 104.833,150.622 101.819,153.635 101.752,153.797 101.752,155.988 96.044,161.696 91.186,161.696 91.024,161.763 89.881,162.906 89.814,163.068 89.814,166.751 cw(c90.043,166.751) 90.272,166.751 90.272,163.163 91.281,162.154 96.139,162.154 96.301,162.087 102.143,156.245 102.21,156.083 102.21,153.892 105.479,150.622 110.617,150.622 110.617,193.192 104.87,193.192 89.637,177.959 89.637,177.292 cw(c89.408,177.292) 89.179,177.292 89.179,178.054 89.246,178.216 104.613,193.583 104.775,193.65 110.617,193.65 110.617,201.93 83.541,201.93 83.541,197.231 83.474,197.069 77.318,190.913 77.318,188.087 77.251,187.925 71.536,182.21 71.374,182.143 65.659,182.143 cw(c65.659,182.372) 65.659,182.601 71.279,182.601 76.86,188.182 76.86,191.008 76.927,191.17 83.083,197.326 83.083,201.93 64.872,201.93 64.872,196.596 64.805,196.434 59.725,191.354 59.563,191.287 59.277,191.287 58.522,190.532 58.522,189.738 cw(c58.293,189.738) 58.064,189.738 58.064,190.627 58.131,190.789 59.02,191.678 59.182,191.745 59.468,191.745 64.414,196.691 64.414,201.93 40.513,201.93 40.513,182.728 58.166,182.728 58.395,182.499 58.166,182.27 40.513,182.27 40.513,150.622 52.984,150.622 52.984,158.75 53.051,158.912 58.512,164.373 cw(c58.674,164.211) 58.903,164.211 58.836,164.049 53.442,158.655

## Other copper
Top Layer:
  rectangle net AGND: 62.103,181.991 62.357,183.261
Mid-Layer 1:
  pour cut-out: 72.517,180.467 76.073,176.911 83.82,176.911 83.82,177.165 76.2,177.165 72.771,180.594
Mid-Layer 2:
  rectangle net VCC: 97.155,153.2 99.657,155.575

## Silkscreen, mask and mechanical layers (free items; w line width, h text height)
Top Overlay:
  text "SHERPA" at 42.418,154.559 h1.52
  text "MK II" at 42.418,152.4 h1.52
Bottom Overlay:
  the board outline again, w0.3

## Text inside footprints (layer, text, board x,y; h text height)
JP1: Top Overlay "6" at 95.631,194.437 h1.27; Top Overlay "5" at 95.631,191.897 h1.27; Top Overlay "2" at 86.233,194.437 h1.27; Top Overlay "1" at 86.487,191.897 h1.27
P1: Top Overlay "7" at 71.374,152.527 h1.27 r180; Top Overlay "1" at 71.374,155.067 h1.27 r180; Top Overlay "6" at 54.102,155.067 h1.27 r180; Top Overlay "12" at 54.102,152.527 h1.27 r180
P2: Top Overlay "7" at 45.593,200.025 h1.27; Top Overlay "1" at 45.593,197.485 h1.27; Top Overlay "6" at 62.865,197.485 h1.27; Top Overlay "12" at 62.865,200.025 h1.27
P3: Top Overlay "7" at 86.233,200.025 h1.27; Top Overlay "1" at 86.233,197.485 h1.27; Top Overlay "6" at 103.505,197.485 h1.27; Top Overlay "12" at 103.505,200.025 h1.27
P4: Top Overlay "7" at 108.712,191.008 h1.27 r270; Top Overlay "1" at 106.172,191.008 h1.27 r270; Top Overlay "6" at 106.172,173.736 h1.27 r270; Top Overlay "12" at 108.712,173.736 h1.27 r270
P5: Top Overlay "7" at 108.712,170.688 h1.27 r270; Top Overlay "1" at 106.172,170.688 h1.27 r270; Top Overlay "6" at 106.172,153.416 h1.27 r270; Top Overlay "12" at 108.712,153.416 h1.27 r270
P6: Top Overlay "7" at 65.913,200.025 h1.27; Top Overlay "1" at 65.913,197.485 h1.27; Top Overlay "6" at 83.185,197.485 h1.27; Top Overlay "12" at 83.185,200.025 h1.27